# Altium PCB fpga_board.PcbDoc (part 2 of 2)
Units mil, origin at the board's own origin, x right, y up, seen from the top; angles counter-clockwise.
Board outline 3600 x 2770 mil, 6 copper layers (Top Layer, Layer 1, Layer 2, Layer 3, Layer 4, Bottom Layer), stack 32.112 mil thick; 161 components, 170 nets, 630 pads, 157 vias.
Unrouted connection lines stored in the file: 209.
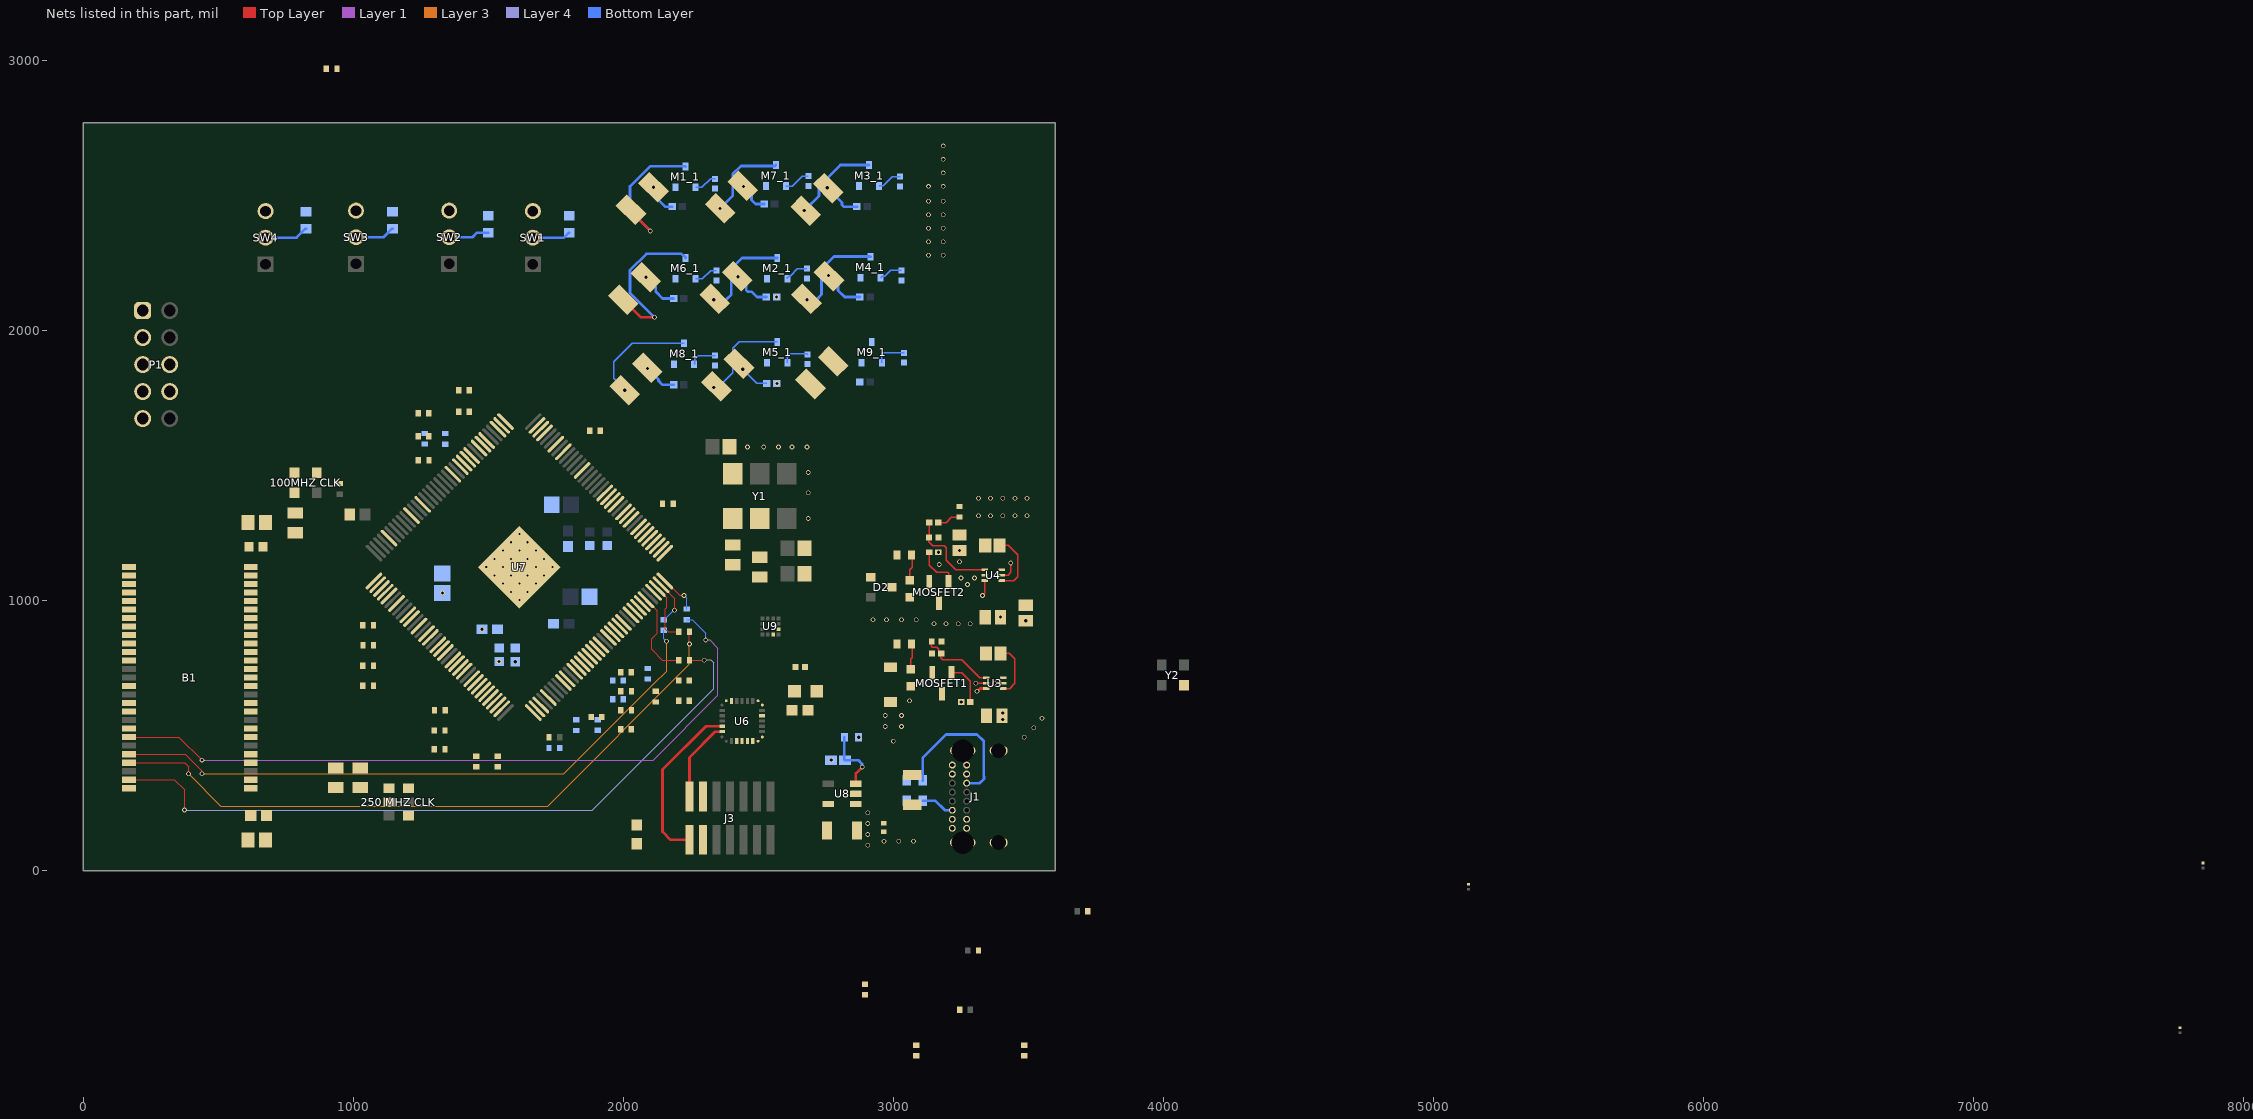
[diagram p6: the nets of this part, all layers, seen from the top]

## Part data (continued)
D2: library part CMP-1060-01004-1, "Zener Voltage Regulator, 225 mW, 3-Pin SOT-23, Pb-Free, Tape and Reel", Manufacturer="On Semiconductor", ComponentLink1Description="Manufacturer URL", ComponentLink1URL=http://www.onsemi.com/, ComponentLink2Description=Datasheet, ComponentLink2URL=http://www.onsemi.cn/pub_link/Collateral/MMBZ5221BLT1-D.PDF, ComponentLink3Description="Package Specification", ComponentLink3URL=http://www.onsemi.cn/pub_link/Collateral/318-08.PDF, DatasheetVersion="Rev. 12", Mounting Technology="Surface Mount", PackageDescription="3-Pin Small Outline Transistor, Body 2.92 x 1.3 mm, Pitch 0.95 mm", PackageReference=SOT-23-3-318-08, PackageVersion="Rev. AP, 11/2009", Packing="Tape and Reel", PartNumber=MMBZ5223BLT1G, RoHS=Pb-Free, VZ Typ (V)=2.7
D3 D4: library part CMP-1426-00006-7, "WURTH ELEKTRONIK - 150060VS75000 - LED, Green, SMD, 0603, 30 mA, 2 V, 570 nm", Case Code (Imperial)=0603, Case Code (Metric)=1608, Color=Green, Forward Current=100mA, Forward Voltage=2V, Max Junction Temperature (Tj)=95°C, Max Operating Temperature=85°C, Max Reverse Voltage (DC)=5V, Min Operating Temperature=-40°C, Power Dissipation=72mW, Test Current=20mA, Case/Package=0603, Dominant Wavelength=570nm, Height=700µm, Length=1.6mm, Lens Style="Clear, Rectangular", Luminous Intensity=40mcd, Mount="Surface Mount", Number of Pins=2, Packaging="Tape and Reel", Peak Wavelength=572nm, REACH SVHC=Unknown, Reverse Voltage=5V, RoHS=Compliant, Viewing Angle=140°, Wavelength=570nm, Width=800µm
D10: library part CMP-1674-00002-6, "LED GREEN CLEAR SMD", Case Code (Imperial)=0805, Case Code (Metric)=2012, Color=Green, Forward Current=30mA, Forward Voltage=2.1V, Lens Color=Colorless, Max Operating Temperature=85°C, Min Operating Temperature=-55°C, Package Quantity=1, Power Dissipation=100mW, Reverse Voltage=5V, Test Current=10mA, Case/Package=0805, Depth=1.25mm, Dominant Wavelength=569nm, Height=1.1mm, Illumination Color=Green, Lead Free="Lead Free", Length=2mm, Lens Style=Diffused, Lens Transparency=Clear, Luminous Intensity=6mcd, Mount="Surface Mount", Number of Elements=1, Number of LEDs=1, Number of Pins=2, Packaging="Tape and Reel", Power Rating=100mW, Radiation Hardening=No, Viewing Angle=130°, Voltage=5V, Wavelength=565nm, Width=1.25mm
J1: library part CMP-196119-000001-2, "CONN RCPT USB2.0 TYPE C 24POS RA", Contact Material="Copper Alloy", Contact Plating=Gold, Gender=Receptacle, Number of Positions=16, Orientation="Right Angle", USB Standard="USB 2.0"
J3: "Connector Header Surface Mount 14 position 0.050\" (1.27mm)", LCSC Part #=C5276598, Manufacturer_Name=SAMTEC, Mouser Part Number=200-FTSH10701FDVKPTR, Arrow Part Number=FTSH-107-01-F-DV-K-P-TR, Arrow Price/Stock=https://www.arrow.com/en/products/ftsh-107-01-f-dv-k-p-tr/samtec?utm_currency=USD&region=nac, Datasheet Link=http://suddendocs.samtec.com/prints/ftsh-1xx-xx-xxx-dv-xxx-xxx-mkt.pdf, Manu Part #=FTSH-107-01-F-DV-K-P-TR, Manufacturer_Part_Number=FTSH-107-01-F-DV-K-P-TR, Mouser Price/Stock=https://www.mouser.co.uk/ProductDetail/Samtec/FTSH-107-01-F-DV-K-P-TR?qs=%252BZP6%2F%252BtExtAI0atx6lcXTg%3D%3D
L1 L2: library part CMP-08253-000154-1, "Shielded Multilayer Inductor 2.2uH ±20% 1000mA 195mΩ SMD 0805", Case Code (Imperial)=0805, Case Code (Metric)=2012, Current Rating=1A, DC Resistance (DCR)=195mR, Inductance=2.2uH, Max Operating Temperature=125°C, Min Operating Temperature=-40°C, Package Quantity=4000, Test Frequency=2MHz, Tolerance=20%, Case/Package=0805, Core Material=Ferrite, Height - Seated (Max)=0.039inch, Lead Free="Lead Free", Length=0.079inch, Mount="Surface Mount", Packaging="Tape and Reel", RoHS Compliant=Yes, Shielding=Shielded, Width=0.049inch
L3: library part CMP-06042-008586-1, "Multilayer type RF Inductor 8.2nH ±5% 0.25Ω 500mA 0402", Case Code (Imperial)=0402, Case Code (Metric)=1005, Current Rating=300mA, DC Resistance (DCR)=330mR, Inductance=8.2nH, Inductance Tolerance=5%, Max Operating Temperature=125°C, Min Operating Temperature=-55°C, Package Quantity=1, Self Resonant Frequency=3.6GHz, Test Frequency=100MHz, Case/Package=0402, Core Material=Air, DC Current=300mA, Depth=0.55mm, Height=0.02inch, Height - Seated (Max)=0.022inch, Lead Free="Lead Free", Length=1mm, Max DC Current=300mA, Military Standard=Not, Mount="Surface Mount", Packaging="Tape and Reel", Q Factor=8, Radiation Hardening=No, REACH SVHC="No SVHC", Shielding=Unshielded, Termination=SMD/SMT, Tolerance=5%, Width=0.5mm
M1_1 M2_1 M3_1 M4_1 M5_1 M6_1 M7_1 M8_1 M9_1: library part CMP-02550-000018-1, "MOSFET N-CH 8V 6A SOT-23", Continuous Drain Current=6A, Drain To Source Breakdown Voltage=8V, Drain To Source Resistance=0.014Ω, Gate To Source Voltage=5V, Input Capacitace At Vds="1070pF @ 4V", Manufacturer=Vishay, Max Forward Diode Voltage=1.2V, Max Junction Temp=+150°C, Package=S-03946, Power Dissipation=1.3W, Pulse Drain Current=30A, Temperature="-55°C to +150°C", Temperature Range Low=-55°C, Typ Forward Diode Voltage=0.82V, Automotive=No, Category=Trans, ComponentLink2Description=Datasheet, ComponentLink2URL=https://www.vishay.com/docs/63302/si2342ds.pdf, Depletion Mode=False, Device Class L1="Discrete Semiconductors", Device Class L2=Transistors, Device Class L3=MOSFETs, Digikey Description="MOSFET N-CH 8V 6A SOT-23", Drain To Source Voltage=8V, Gate Charge At Vgs="10.5nC @ 4.5V", Height=1.12mm, Ipc Land Pattern Name=SOT95P237X100-3, Lead Free=Yes, Manufacturer Part Number=SI2342DS-T1-GE3, Mouser Description="MOSFET 8V 6A 2.5", Number of Channels=1, Number Of N Channels=1, Octopart=https://octopart.com/si2342ds-t1-ge3-vishay-45050957, Reverse Recovery Charge=17nC, Reverse Recovery Time=40ns, RoHS=TRUE, Rthja Max=75°C/W, Standoff Height=0.01mm, Temperature Range High=+150°C, Threshold Vgs Max=0.8V, Threshold Vgs Min=0.35V, Transconductance=75S, Turn Off Delay Time=65ns, Turn On Delay Time=6ns
MOSFET1 MOSFET2 U3 U4: "No Description Available", Manufacturer_Name="Diodes Inc", Copyright="Copyright (C) 2025 Ultra Librarian. All rights reserved.", RefDes=RefDes, Type=Type
  MOSFET1 MOSFET2: Manufacturer_Part_Number=DMP3068L-7
  U3 U4: Manufacturer_Part_Number=AP61300Z6-7
P1: library part CMP-1502-00007-2, Color=Black, Contact Resistance=20mΩ, Current Rating=3A, Flammability Rating="UL94 V-0", Insulation Resistance=1GΩ, Max Operating Temperature=105°C, Min Operating Temperature=-40°C, Operating Supply Voltage=250V, Connector Type="Male Pin", Contact Gender=Male, Contact Material=Copper, Contact Plating=Gold, Gender=Male, Height=8.85mm, Housing Material=PBT, Insulation Material=PBT, Lead Free="Lead Free", Lead Pitch=2.54mm, Length=20.36mm, Mount="Through Hole", NexarPartId=8917783, Number of Contacts=10, Number of Pins=10, Number of Positions=10, Number of Rows=2, Orientation=Vertical, Pitch=2.54mm, REACH SVHC=Unknown, RoHS=Compliant, Row Spacing=2.54mm, Termination=Solder, Voltage Rating=250V, Voltage Rating (DC)=250V, Width=20.36mm
R1 R6: library part CMP-1011-00768-4, "Chip Resistor, 200 KOhm, +/- 1%, 100 mW, -55 to 155 degC, 0402 (1005 Metric), RoHS, Tape and Reel", Case Code (Imperial)=0402, Case Code (Metric)=1005, Manufacturer="Basic Passives", Max Operating Temperature="155 degC", Min Operating Temperature="-55 degC", Package Quantity=10000, Power Rating="100 mW", Resistance="200 KOhm", Tolerance=1%, Voltage Rating="50 V", Case\/Package=0402, ComponentLink1Description="Manufacturer URL", ComponentLink1URL=http://www.panasonic.com/, ComponentLink2Description=Datasheet, ComponentLink2URL=http://industrial.panasonic.com/cdbs/www-data/pdf/RDA0000/AOA0000C86.pdf, DatasheetVersion=04/2015, Height="0.35 mm", Length="1 mm", Mount="Surface Mount", Mounting Technology="Surface Mount", PackageDescription="2-Pin Surface Mount Device, Body 1 x 0.5 mm", PackageReference=0402, Packaging="Tape and Reel", PartNumber=ERJ-2RKF2003X, Pins=2, Radiation Hardening=No, REACH SVHC="No SVHC", RoHSCompliant=true, Width="0.5 mm"
R1_1 R2_1 R3_1 R4_1 R5_1 R6_1 R7_1 R8_1 R9_1: library part CMP-2002-05589-2, "Thick Film Chip Resistors 0402 270Ω 0.0625W 5% 200ppm/°C", Case Code (Imperial)=0402, Case Code (Metric)=1005, Max Operating Temperature=125°C, Min Operating Temperature=-55°C, Package Quantity=10000, Power Rating=62.5mW, Resistance=270R, Temperature Coefficient=200ppm/°C, Tolerance=5%, Voltage Rating=50V, Case/Package=0402, Composition="Thick Film", Contact Plating=Tin, Depth=0.5mm, Height=0.35mm, Length=1mm, Military Standard=Not, Mount="Surface Mount", Packaging="Tape and Reel", Radiation Hardening=No, Termination=SMD/SMT, Thickness=356um, Width=0.5mm
R1_2 R2_2 R3_2 R4_2 R5_2 R6_2 R7_2 R8_2 R9_2: library part CMP-250906-202248-1, "RES Thin Film,  100kΩ, 0.5%, 0.063W, 25ppm/°C, 0402"
R2 R4 R5: library part CMP-2002-07343-1, Manufacturer="Yageo / Phycomp", Part Number=RC0402FR-07100KL
R7: library part CMP-2002-07122-1, Manufacturer="Yageo / Phycomp", Part Number=RC0402FR-0744K2L
R8: library part CMP-2002-07501-2, Case Code (Imperial)=0402, Case Code (Metric)=1005, Max Operating Temperature=155°C, Max Power Dissipation=63mW, Min Operating Temperature=-55°C, Power Rating=62.5mW, Resistance=20kΩ, Temperature Coefficient=100ppm/°C, Tolerance=1%, Voltage Rating=50V, Case/Package=0402, Composition="Thick Film", Depth=500µm, Features="Moisture Resistant", Height=350µm, Lead Free="Lead Free", Length=1mm, Military Standard=Not, NexarPartId=39794396, Number of Pins=2, Number of Terminations=2, Packaging="Tape & Reel", REACH SVHC="No SVHC", RoHS=Compliant, Schedule B="8533210045, 8533210045", Termination=SMD/SMT, Voltage Rating (DC)=50V, Width=500µm
R9 R10 R57: library part CMP-2100-03664-2, "RES 10K OHM 1% 1/10W 0603", Case Code (Imperial)=0603, Case Code (Metric)=1608, Max Operating Temperature=155°C, Max Power Dissipation=100mW, Min Operating Temperature=-55°C, Resistance=10kR, Resistance Tolerance=1%, Resistor Type="Thick Film", Temperature Coefficient=100ppm/°C, Voltage Rating=75V, Voltage Rating (DC)=50V, Case/Package=0603, Construction=Rectangular, Depth=0.8mm, Features="Moisture Resistant", Height=0.45mm, Lead Free="Lead Free", Lead Pitch=0.3mm, Length=1.6mm, Military Standard=Not, Number of Pins=2, Number of Terminations=2, Packaging="Tape and Reel", Power Rating=100mW, RoHS Compliant=Yes, Series=RC, Size Code=0603, Termination=SMD/SMT, Tolerance=1%, Weight=7.1E-05oz, Width=0.8mm
R20 R21 R23 R24 R25 R26 R27 R28 R29 R30 R31 R32 R33 R34 R35 R36 R37 R38 R39 R40 R41 R42 R44 R45 R46 R47 R48 R49 R50 R51 R52 R60 R63 R64 R65 R66 R67 R68 R69 R?: library part CMP-00621-71392720-1, "RT0402BRE0750RL Fixed Resistor, Thin Film, 0.0625W, 50ohm, 50V, 0.1% +/-Tol, 50ppm/Cel, Surface Mount, 0402", Case/Package=0402, Max Operating Temperature=155°C, Max Power Dissipation=63mW, Min Operating Temperature=-55°C, Resistance=50Ω, Temperature Coefficient=50ppm/°C, Tolerance=0.1%, Composition="Thin Film", Features="Moisture Resistant", Height=355.6µm, Length=990.6µm, NexarPartId=71392720, Number of Terminations=2, Packaging="Tape & Reel", RoHS=Compliant, Width=508µm
R53 R54 R55 R56: library part CMP-1012-00086-1, "3K3 0.1W 5% 0603 (1608 Metric)  SMD", Case-EIA=0603, Case-Metric=1608, Power="0.1 W", Tolerance="5 %", Technology=SMT
R58 R59: library part CMP-2000-04091-1, Manufacturer=Yageo, Part Number=RC0603FR-075K1L
R61: library part CMP-03412-049221-1, "RES 47kΩ 5.00% 0.1W 0603", Case Code (Imperial)=0603, Case Code (Metric)=1608, Max Operating Temperature=155°C, Max Power Dissipation=100mW, Min Operating Temperature=-55°C, Ratings=AEC-Q200, Resistance=47kR, Resistor Type="Thick Film", Temperature Coefficient=100ppm/°C, Tolerance=5%, Voltage Rating=50V, Case/Package=0603, Features="Moisture Resistant", Height=0.45mm, Length=1.6mm, Number of Terminations=2, Packaging="Tape and Reel", Power Rating=100mW, RoHS Compliant=Yes, Series=AC, Termination=SMD/SMT, Width=0.8mm
R62: library part CMP-250906-167145-1, "RES Thin Film,  10kΩ, 0.1%, 0.063W, 50ppm/°C, 0402"
R_? R_? R_? R_STDBY1 R_STDBY_2: library part CMP-2002-02973-2, "RES SMD 10K OHM 0.1% 1/16W 0402", Manufacturer=Yageo, Package=RT0402, Power Rating=0.063W, Resistance=10KΩ, Temperature="-55°C to +155°C", Temperature Coefficient="50 ppm/°C", Temperature Range High=+155°C, Temperature Range Low=-55°C, Tolerance=0.001, Voltage Rating=50V, Automotive=No, Category=Res, ComponentLink2Description=Datasheet, ComponentLink2URL=http://www.yageo.com/documents/recent/PYu-RT_1-to-0.01_RoHS_L_9.pdf, Composition="Thin Film", Device Class L1="Passive Components", Device Class L2=Resistors, Device Class L3="Chip SMD Resistors", Digikey Description="RES SMD 10K OHM 0.1% 1/16W 0402", Footprint Url=http://www.yageo.com/exep/pages/download/literatures/PYu-R_Mount_10.pdf, Height=0.35mm, Ipc Land Pattern Name=RESC10050X30, Lead Free=Yes, Manufacturer Part Number=RT0402BRE0710KL, Mouser Description="Res Thin Film 0402 10K Ohm 0.1% 1/16W ±50ppm/°C Molded SMD Paper T/R", Octopart=https://octopart.com/rt0402bre0710kl-yageo-1416557, RoHS=TRUE, Series=RT
R_CLK1 R_CLK2 R_CLK3 R_CLK_4 R_CLK_5: library part CMP-2001-03694-1, Manufacturer="Vishay Dale", Part Number=CRCW080522R0JNTA
SW1 SW2 SW3 SW4: library part CMP-1696-00002-1, "Slide Switch, 500 V, -20 to 70 degC, 3-Pin THD, RoHS", Case\Package=SOT-23-5, Dropout Voltage="300 mV", Max Input Voltage="8 V", Max Operating Temperature="85 degC", Max Ouput Current="150 mA", Max Power Dissipation="250 mW", Min Input Voltage="4.3 V", Min Operating Temperature="-40 degC", Nominal Output Voltage="3.3 V", Package Quantity=3000, ComponentLink1Description="Manufacturer URL", ComponentLink1URL=http://www.e-switch.ch/en/, ComponentLink2Description=Datasheet, ComponentLink2URL=https://www.e-switch.com/system/asset/product_line/data_sheet/119/EG.pdf, DatasheetVersion=Oct-15, Height="1.3 mm", Length="3 mm", Mount="Surface Mount", Output Current="150 mA", Output Voltage="3.3 V", Outputs=1, PackageDescription="3-Pin Through Hole Device, Body 11.6 x 4 mm, Pitch 2.5 mm", PackageReference=EG1218, Packaging="Tape and Reel", Pins=5, Power Rating="250 mW", Radiation Hardening=No, REACH SVHC="No SVHC", RoHSCompliant=true, Width="1.8 mm"
U6: library part CMP-12105-000108-1, "IC MCU 32BIT 64KB FLASH 28UFQFPN"
U7: library part CMP-0038-00212-1, "Cyclone IV Family FPGA, 1.2V Core, 91 I/O Pins, 2 PLLs, 144-Pin QFP, Speed Grade 8, Commercial Grade, Pb-Free", Manufacturer=Altera, Code_JEDEC=MS-026-BFB-HD, ComponentLink1Description="Manufacturer URL", ComponentLink1URL=http://www.altera.com/, ComponentLink2Description=Handbook, ComponentLink2URL=http://www.altera.com/literature/hb/cyclone-iv/cyclone4-handbook.pdf, ComponentLink3Description=Pinout, ComponentLink3URL=http://www.altera.com/literature/lit-dp.jsp?category=cyc%204&showspreadsheet=y, ComponentLink4Description="Package Specification", ComponentLink4URL=http://www.altera.com/devicepackaging/04R00402-00.pdf, DatasheetVersion="ver1.6, Nov-2011", PackageDescription="144-Pin Plastic Enhanced Quad Flat Pack (EQFP) - Wire Bond - A:1.65 - D2:5.4", PackageReference=EQFP144_A-165_D2-54, PackageVersion="ver1.0, Jan-2011"
U8: library part CMP-04917-000053-1, "IC REG LINEAR 3.3V 300MA SOT23-5", Dropout Voltage=125mV, Manufacturer="Texas Instruments", Max Junction Temp=+125°C, Max Supply Voltage=5.5V, Min Supply Voltage=1.4V, Nominal Supply Current=34uA, Output Current=300mA, Output Voltage=3.3V, Package=DBV0005A, Temperature="-40°C to +125°C", Temperature Range Low=-40°C, Accuracy Percentage=1%, Automotive=No, Category=IC, ComponentLink2Description=Datasheet, ComponentLink2URL=http://www.ti.com/lit/ds/symlink/tlv733p.pdf, Device Class L1="Integrated Circuits (ICs)", Device Class L2="Power Management ICs", Device Class L3="Voltage Regulators - Linear", Digikey Description="IC REG LINEAR 3.3V 300MA SOT23-5", Height=1.45mm, Lead Free=Yes, Manufacturer Part Number=TLV73333PDBVR, Mouser Description="LDO Voltage Regulators Capacitr-Free 300-mA 5-SOT-23 -40 to 125", Number Of Outputs=1, Octopart=https://octopart.com/tlv73333pdbvr-texas+instruments-51080890, Output Type=Fixed, RoHS=TRUE, Standoff Height=0mm, Temperature Range High=+125°C
U9: library part CMP-12175-000006-1, "ACCEL 2-16G I2C/SPI 12LGA", Manufacturer=STMicroelectronics, Max Supply Voltage=3.6V, Min Supply Voltage=1.62V, Operating Supply Current=0.38-90uA, Package=LGA12-DM00170568, Temperature="-40°C to +85°C", Temperature Range High=+85°C, Temperature Range Low=-40°C, Accel Range=2/4/8/16g, Accel Resolution=14bits, Automotive=No, Category=IC, ComponentLink2Description=Datasheet, ComponentLink2URL=https://www.st.com/resource/en/datasheet/lis2dw12.pdf, Device Class L1=Sensors, Device Class L2="Motion Sensors", Device Class L3=Accelerometers, Digikey Description="ACCEL 2-16G I2C/SPI 12LGA", Footprint Url=https://www.st.com/content/ccc/resource/technical/document/technical_note/73/17/9c/16/dd/96/4a/01/CD00134799.pdf/files/CD00134799.pdf/jcr:content/translations/en.CD00134799.pdf, Height=0.7mm, Lead Free=Yes, Manufacturer Part Number=LIS2DW12TR, Mouser Description="Accelerometer Triple ±2g/±4g/±8g/±16g 1.62V to 3.6V 0.244mg/digit/0.488mg/digit/0.976mg/digit/1.952mg/digit 12-Pin LG...", Octopart=https://octopart.com/lis2dw12tr-stmicroelectronics-77080925, RoHS=TRUE, Sensor Output=I2C,SPI
Y1: library part CMP-00572-106942874-3, "Renesas XL Family of Low Phase Noise Quartz-based PLL Oscillators", Case/Package=CLCC, Max Input Voltage=3.465V, Max Operating Temperature=85°C, Max Output Frequency=999.9MHz, Min Input Voltage=3.135V, Min Operating Temperature=-40°C, ComponentLink1Description="Manufacturer's Website", ComponentLink1URL=http://www.renesas.com, ComponentLink2Description="Datasheet URL", ComponentLink2URL=https://octopart.com/cad-content/api/get-model-datasheet/15189/106942874, ComponentLink3Description="Manufacturer's Package Drawing", ComponentLink3URL=https://www.renesas.com/en/document/psc/ju6-package-outline-70-x-50-mm-body-13-mm-thick, Height=1.45mm, HelpURL=https://octopart.com/cad-content/api/get-model-datasheet/15189/106942874, Mount="Surface Mount", Number of Pins=6, Output Type=LVDS, RoHS=Compliant
Y2: library part CMP-27762-007622-1, "MEMS OSC XO 50.0000MHZ CMOS SMD", Case/Package=SMD/SMT, Frequency=50MHz, Frequency Stability=50ppm, Load Capacitance=15pF, Max Operating Temperature=85°C, Max Supply Current=16mA, Max Supply Voltage=4V, Min Operating Temperature=-40°C, Min Supply Voltage=-300mV, Operating Supply Voltage=3.3V, Height=0.035inch, Lead Free="Lead Free", Length=0.126inch, Mount="Surface Mount", Number of Pins=4, Packaging="Tape and Reel", REACH SVHC="No SVHC", Series="Pure Silicon™ ASEMB", Termination=SMD/SMT, Width=0.098inch

## Via types
v1: diameter 17.72, hole 11.81, Top Layer to Bottom Layer, 132 vias
v2: diameter 19.68, hole 7.87, Top Layer to Bottom Layer, 25 vias

## Nets (pads, with @x,y where several pads share a name; then routed paths per layer and width w, separated by ;. In a path a pad name is that pad's centre, name@x,y a point inside that pad or via, vN(x,y) a via of type N, cw(c..) or ccw(c..) an arc to the next point about the centre after c; other vN are vias at no path point)
1.2V: C19.2 C20.2 C21.1 C22.2 U7.5 U7.29 U7.37 U7.45 U7.61 U7.78 U7.102 U7.109 U7.116 U7.134
  other v1: 1600,774.41 1540,775 1476.44,895 1330,1029.57
1.2V_OUT: C8.1 L1.2 MOSFET1.3 R1.1 U3.6
1.2V_POWER_OUT: D1.1 D3.2 MOSFET1.2
  other v1: 3000,480 2970,535 3030,535 2970,575 3030,575 3060,630
2.5V: U7.35 U7.107
2.5V_OUT: C10.1 L2.2 MOSFET2.3 R6.1 U4.6
2.5V_POWER_OUT: D2.3 D4.2 MOSFET2.2
3.3V: R2_1.1 R5_1.1
  other v1: 2568.84,1805 2567.68,2125
3v3: "100MHZ CLK.4" "250 MHZ CLK.6" C11.2 C12.2 C13.1 C14.2 C16.2 C17.2 C18.1 C_CLK.1 C_CLK_1.2 C_CLK_3.2 C_CLK_4.1 C_CLK_t5.2 C_CLKt.1 R1_1.1 R3_1.1 R4_1.1 R6_1.1 R7_1.1 R8_1.1 R9_1.1 R_STDBY1.1 R_STDBY_2.1 SW1.1 SW2.1 SW3.1 SW4.1 U7.17 U7.26 U7.40 U7.47 U7.56 U7.62 U7.81 U7.93 U7.117 U7.122 U7.130 U7.139 U9.9 Y1.6 Y2.4
  other v1: 1798.56,915 1804.57,1015 1875,1255.59 1940,1255.59 1795,1258.56 1805.87,1355 2275,1375 2320,1375 2275,1425 2320,1425 2275,1470 2320,1470 2275,1530 2275,1595 2275,1645 2320,1645 2223.84,1800 2913.84,1810 2223.84,2120 2913.84,2125 2218.84,2460 2902.68,2460 2560,2470
3v3: C7.1 C9.1 U3.3 U3.5 U4.3 U4.5 | length 187.1
  Top Layer w5: v1(3330,1020) 3338.5,1028.5 U4.3@3338.5,1075.32 ; v1(3375,695) U3.5@3406.5,695 ; U4.5@3401.5,1095 3425,1095 3435,1105 v1(3435,1140)
  Top Layer w10: v1(3310,665) 3311.57,665 3321.57,675 3330,675
  other v1: 3490,926.43 3397.15,940
5V: CJ_2.2 L3.2 R57.2 U8.1
  other v1: 2905,95 2965,110 3020,110 3075,110 2905,135 2905,175 2905,215 2871.64,495
100MHZ_CLK: R_CLK1.1 U7.23
150MGHZ_CLK: R_CLK2.1 U7.24
150NMGHZ_CLK: R_CLK3.1 U7.25
300MHZ_CLK: R_CLK_5.2 U7.89
300NMHZ_CLK: R_CLK_4.2 U7.88
+3V3: 
\: B1.1 B1.14 B1.27 C23.2 C24.2 C26.2 C27.2 C28.2 R61.1 R_?.1@2895,-459.37 R_?.1@3085,-684.68 R_?.2@3485,-645.32 U6.3 U8.5
"Addr Bit 0": B1.23 R37.1
"Addr BIt 0 Term": R37.2 U7.7
"Addr Bit 1": B1.24 R38.1
"Addr Bit 1 Term": R38.2 U7.33
"Addr Bit 2": B1.25 R39.1
"Addr Bit 2 Term": R39.2 U7.32
"Addr Bit 3": B1.26 R40.1
"Addr Bit 3 Term": R40.2 U7.31
"Addr Bit 4": B1.29 R41.1
"Addr Bit 4 Term": R41.2 U7.66
"Addr Bit 5": B1.30 R42.1
"Addr Bit 5 Term": R42.2 U7.65
"Addr Bit 6": B1.31 R44.1
"Addr Bit 6 Term": R44.2 U7.60
"Addr Bit 7": B1.32 R45.1
"Addr Bit 7 Term": R45.2 U7.59
"Addr Bit 8": B1.33 R46.1
"Addr Bit 8 Term": R46.2 U7.58
"Addr Bit 9": B1.34 R47.1
"Addr Bit 9 Term": R47.2 U7.55
"Addr Bit 10": B1.22 R48.1
"Addr Bit 10 Term": R48.2 U7.54
"Addr Bit 11": B1.35 R49.1
"Addr Bit 11 Term": R49.2 U7.80
"Addr Bit 12": B1.36 R50.1
"Addr Bit 12 Term": R50.2 U7.100
"Bank Select 0": B1.20 R63.2
"Bank Select 0 Term": R63.1 U7.111
"Bank Select 1": B1.21 R64.2
"Bank Select 1 Term": R64.1 U7.110
CC1: J1.A5 R58.1 | length 124
  Bottom Layer w10: R58.1@3109.06,260 3155,260 3190.47,224.53 J1.A5@3218.35,224.53
CC2: J1.B5 R59.1 | length 566.4
  Bottom Layer w10: R59.1@3109.06,335 3109.06,419.06 3195,505 3310,505 3335,480 3335,350 3335.86,349.14 3335.86,340.86 3319.92,324.92 J1.B5@3271.5,324.92
"CLK Input": B1.38 R60.1
"CLK Input Term": R60.2 U7.30
CLK_Enable: B1.37 U7.87
"Column Address Strobe": B1.17 R66.2
"Column Address Strobe Term": R66.1 U7.115
"Data Bit 0": B1.2 R20.1
"Data Bit 0 Term": R20.2 U7.13
"Data Bit 1": B1.4 R21.1
"Data Bit 1 Term": R21.2 U7.11
"Data Bit 2": B1.5 R23.1
"Data Bit 2 Term": R23.2 U7.10
"Data Bit 3": B1.7 R24.1
"Data Bit 3 Term": R24.2 U7.28
"Data Bit 4": B1.8 R25.1
"Data Bit 4 Term": R25.2 U7.53
"Data Bit 5": B1.10 R26.1
"Data Bit 5 Term": R26.2 U7.52
"Data Bit 6": B1.11 R27.1
"Data Bit 6 Term": R27.2 U7.51
"Data Bit 7": B1.13 R28.1
"Data Bit 7 Term": R28.2 U7.50
"Data Bit 8": B1.42 R29.1
"Data Bit 8 Term": R29.2 U7.49
"Data Bit 9": B1.44 R30.1
"Data Bit 9 Term": R30.2 U7.46
"Data Bit 10": B1.45 R31.1
"Data Bit 10 Term": R31.2 U7.39
"Data Bit 11": B1.47 R32.1
"Data Bit 11 Term": R32.2 U7.38
"Data Bit 12": B1.48 R33.1 | length 2664.1
  Top Layer w1.5: B1.48@168.98,495.55 354.45,495.55 v1(440,410)
  Layer 1 w1.5: v1(440,410) 2110,410 2350,650 2350,825 2320,855 v1(2305,855)
  Bottom Layer w1.5: R33.1@2235,930.32 2254.69,930.32 2305,880 v1(2305,855)
"Data Bit 12 Term": R33.2 U7.72 | length 147.9
  Top Layer w1.5: U7.72@2153.68,1073.5 2155.09,1073.5 2208.59,1020 v1(2225,1020)
  Bottom Layer w1.5: v1(2225,1020) 2235,1010 R33.2@2235,969.68
"Data Bit 13": B1.50 R34.1 | length 2339.1
  Top Layer w1.5: B1.50@168.98,432.56 377.44,432.56 438.89,371.11 438.89,361.11 v1(440,360)
  Layer 3 w1.5: v1(440,360) 1780,360 2115,695 2160,740 v1(2160,850)
  Bottom Layer w1.5: R34.1@2150,890.63 2150,860 v1(2160,850)
"Data Bit 13 Term": R34.2 U7.71 | length 170
  Top Layer w1.5: U7.71@2139.76,1059.58 2139.76,1057.41 2190,1007.17 v1(2190,965)
  Bottom Layer w1.5: R34.2@2150,930 2151.97,930 2161.06,939.09 2161.06,939.24 2183.72,961.9 2186.9,961.9 v1(2190,965)
"Data Bit 14": B1.51 R35.1 | length 2494.8
  Top Layer w1.5: B1.51@168.98,401.06 170.04,400 375,400 390,385 v1(390,360) ; v1(2245,840) R35.1@2245,885
  Layer 3 w1.5: v1(390,360) 510,240 1720,240 2245,765 v1(2245,840)
"Data Bit 14 Term": R35.2 U7.70 | length 220.6
  Top Layer w1.5: U7.70@2125.84,1045.66 2160,1011.5 2160,975 2155.63,970.63 2155.63,895.25 2165.88,885 R35.2@2205.63,885
"Data Bit 15": B1.53 R36.1 | length 2633.3
  Top Layer w1.5: B1.53@168.98,338.07 336.93,338.07 375,300 v1(375,225) ; R36.1@2245,780 v1(2300,780)
  Layer 4 w1.5: v1(375,225) 1885,225 2335,675 2335,770 2323.85,781.15 2301.15,781.15 v1(2300,780)
"Data Bit 15 Term": R36.2 U7.64 U7.67 | length 326.3
  Top Layer w1.5: U7.67@2084.08,1003.9 2125,962.99 2125,880 2105,860 2105,820 2145,780 R36.2@2205.63,780
DEBUG_SWCLK: U6.21
DEBUG_SWDIO: U6.20
DEBUG_SWO: 
EN: C15.2 R57.1 U8.3 | length 239.2
  Top Layer w10: U8.3@2861.18,322.4 2861.18,361.18 v1(2885,385)
  Bottom Layer w10: R57.1@2818.36,495 2818.36,411.86 C15.2@2820.22,410 2870,410 2883.52,396.48 2883.52,386.48 v1(2885,385)
FB_Voltage_1.25: R1.2 R2.1 U3.1 | length 286.7
  Top Layer w5: R1.2@3142.28,850 3140,847.72 3140,831.26 3142.93,828.33 3160.26,828.33 3168.54,820.05 3168.54,813.2 R2.1@3176.73,805 3175,803.27 3175,790 3183.33,781.67 3253.33,781.67 3320.31,714.68 U3.1@3343.5,714.68
FB_Voltage_2.5: R6.2 R7.1 U4.1 | length 350.4
  Top Layer w5: R6.2@3132.28,1235 3130,1232.72 3130.4,1232.32 3130.4,1219.6 3146.67,1203.33 3188.74,1203.33 3195,1197.07 3195,1150 3230.31,1114.68 U4.1@3338.5,1114.68 ; R6.2@3132.78,1235.49 R7.1@3132.78,1289.51
  Top Layer w10: R7.1@3132.78,1289.51 R7.1@3133.27,1290
Floating: P1.6 P1.7 P1.8
FPGA_CLK: R51.2
FPGA_DI: R?.2
FPGA_DI: R?.1
FPGA_DO: R52.2
GND: "100MHZ CLK.2" "250 MHZ CLK.3" B1.28 B1.54 C7.2 C8.2 C9.2 C10.2 C11.1 C12.1 C13.2 C14.1 C15.1 C16.1 C17.1 C18.2 C19.1 C20.1 C21.2 C22.1 C23.1 C24.1 C26.1 C27.1 C28.1 C_CLK.2 C_CLK_1.1 C_CLK_3.1 C_CLK_4.2 C_CLK_t5.1 C_CLKt.2 CJ_1.1 CJ_2.1 D1.2 D2.1 D10.1 J1.1 J1.2 J1.3 J1.4 J1.A1 J1.A12 J1.B1 J1.B12 J3.11 M1_1.2 M2_1.2 M3_1.2 M4_1.2 M5_1.2 M6_1.2 M7_1.2 M8_1.2 M9_1.2 R1_2.1 R2.2 R2_2.1 R3_2.1 R4.2 R4_2.1 R5.2 R5_2.1 R6_2.1 R7_2.1 R8.2 R8_2.1 R9.1 R9_2.1 R10.1 R53.1 R54.1 R55.1 R56.1 R58.2 R59.2 R62.1 SW1.3 SW2.3 SW3.3 SW4.3 U3.2 U4.2 U6.4 U7.4 U7.19 U7.22 U7.27 U7.41 U7.48 U7.57 U7.63 U7.79 U7.82 U7.95 U7.118 U7.123 U7.131 U7.140 U7.145 U8.2 U9.6 U9.8 Y1.3 Y2.2 | length 38.5
  Top Layer w5: v1(3305,695) U3.2@3343.5,695
  other v1: 2770,410 3485,495 3520,530 3405,560 3550,565 3405,585 3251.54,625 3150,915 3195,915 3240,915 3285,915 2925,930 2975,930 3030,930 3085,930 3275,1060 3250,1085 3300,1085 3170,1135 3245,1145 3166.73,1180 3245,1186.43 2685,1305 3315,1315 3360,1315 3405,1315 3450,1315 3495,1315 3315,1380 3360,1380 3405,1380 3450,1380 3495,1380 2685,1400 2685,1475 2460,1570 2520,1570 2575,1570 2625,1570 2680,1570 3130,2280 3185,2280 3130,2330 3185,2330 3130,2380 3185,2380 3130,2430 3185,2430 3130,2480 3185,2480 3130,2535 3185,2535 3185,2585 3185,2635 3185,2685
  other v2: 1615,1002.51 1584.38,1033.13 1645.62,1033.13 1553.75,1063.75 1615,1063.75 1676.25,1063.75 1523.13,1094.38 1584.38,1094.38 1645.62,1094.38 1706.87,1094.38 1492.51,1125 1553.75,1125 1615,1125 1676.25,1125 1737.49,1125 1523.13,1155.62 1584.38,1155.62 1645.62,1155.62 1706.87,1155.62 1553.75,1186.25 1615,1186.25 1676.25,1186.25 1584.38,1216.87 1645.62,1216.87 1615,1247.49
"Higher Byte Mask": B1.39 R68.2
"Higher Byte Mask Term": R68.1 U7.120
IO1: M1_1.1 R1_2.2 U7.83 | length 85.7
  Bottom Layer w5: M1_1.1@2267.4,2531.24 2291.24,2531.24 2322.86,2562.86 R1_2.2@2340,2562.86
IO2: M2_1.1 R2_2.2 U7.75 | length 90
  Bottom Layer w5: M2_1.1@2607.4,2192.48 2607.4,2195.73 2615.91,2204.23 2619.15,2204.23 2644.92,2230 R2_2.2@2680,2230
IO3: M3_1.1 R3_2.2 U7.74 | length 91.9
  Bottom Layer w5: M3_1.1@2947.4,2536.24 2949.14,2537.98 2962.98,2537.98 2995.71,2570.71 R3_2.2@3025,2570.71
IO4: M4_1.1 R4_2.2 U7.73 | length 90.4
  Bottom Layer w5: M4_1.1@2952.4,2196.24 2959.14,2202.98 2967.98,2202.98 2990,2225 3027.86,2225 R4_2.2@3030,2222.86
IO5: M5_1.1 R5_2.2 U7.3 | length 103
  Bottom Layer w5: M5_1.1@2607.4,1881.24 2607.4,1902.4 2620,1915 2679.83,1915 R5_2.2@2682.8,1912.03
IO6: M6_1.1 R6_2.2 U7.2 | length 90.2
  Bottom Layer w5: M6_1.1@2267.4,2192.48 2292.48,2192.48 2322.86,2222.86 R6_2.2@2345,2222.86
IO7: M7_1.1 R7_2.2 U7.1 | length 97.8
  Bottom Layer w5: M7_1.1@2602.4,2536.24 2626.31,2536.24 2662.93,2572.86 R7_2.2@2685,2572.86
IO8: M8_1.1 R8_2.2 U7.34 | length 100.2
  Bottom Layer w5: M8_1.1@2262.4,1876.24 2265.06,1878.9 2265.06,1895.06 2277.86,1907.86 R8_2.2@2340,1907.86
IO9: M9_1.1 R9_2.2 U7.69 | length 116.1
  Bottom Layer w5: M9_1.1@2957.4,1881.24 2957.4,1912.6 2962.66,1917.86 R9_2.2@3040,1917.86
"JTAG TCK": P1.1 U7.16
"JTAG TDI": P1.9 U7.15
"JTAG TDO": P1.3 U7.20
"JTAG TMS": P1.5 U7.18
"Lower Byte Mask": B1.15 R67.2
"Lower Byte Mask Term": R67.1 U7.119
MEM_CS: R_?.1@3485,-684.68 U7.84
Net3_1_1: 3_1.1 M3_1.3 | length 330.4
  Bottom Layer w10: v1(2670,2445) 2725,2500 2725,2535 2803.76,2613.76 M3_1.3@2910,2613.76
Net3_1_2: 3_1.2 R3_1.2 | length 144.4
  Bottom Layer w10: v1(2755,2530) 2810,2475 2810,2465.86 2815.86,2460 R3_1.2@2865,2460
"Net100MHZ CLK_1": "100MHZ CLK.1" R_STDBY1.2
"Net100MHZ CLK_3": "100MHZ CLK.3" R_CLK1.2
"Net250 MHZ CLK_1": "250 MHZ CLK.1" R_STDBY_2.2
"Net250 MHZ CLK_4": "250 MHZ CLK.4" R_CLK2.2
"Net250 MHZ CLK_5": "250 MHZ CLK.5" R_CLK3.2
NetD1_1_1: D1_1.1 M1_1.3 | length 540.6
  Top Layer w10: D1_1.1@2028.24,2448.24 2028.24,2441.76 v1(2100,2370)
  Bottom Layer w10: v1(2100,2370) 2025,2445 2025,2535 2100,2610 2228.76,2610 M1_1.3@2230,2608.76
NetD1_1_2: D1_1.2 R1_1.2 | length 115.8
  Bottom Layer w10: v1(2111.76,2531.76) 2130,2513.52 2130,2485 2155,2460 R1_1.2@2181.16,2460
NetD2_1_1: D2_1.1 M2_1.3 | length 354.9
  Bottom Layer w10: v1(2335,2115) 2380,2115 2400,2135 2400,2230 2440,2270 M2_1.3@2570,2270
NetD2_1_2: D2_1.2 R2_1.2 | length 147.3
  Bottom Layer w10: v1(2425,2200) 2455,2170 2455,2150.86 2460.86,2145 2475,2145 2495,2125 R2_1.2@2530,2125
NetD3_1: D3.1 R9.2 | length 97
  Top Layer w5: D3.1@3065,746.5 3065,785 3070,790 3070,836.64 R9.2@3066.64,840
NetD4_1: D4.1 R10.2 | length 99
  Top Layer w5: D4.1@3060,1076.5 3060,1115 3070,1125 3070,1166.64 R10.2@3066.64,1170
NetD4_1_1: D4_1.1 M4_1.3 | length 357.4
  Bottom Layer w10: v1(2680,2115) 2715,2115 2734.21,2134.21 2734.21,2229.21 2780,2275 2913.76,2275 M4_1.3@2915,2273.76
NetD4_1_2: D4_1.2 R4_1.2 | length 161
  Bottom Layer w10: v1(2760,2205) 2795,2170 2795,2150 2820,2125 R4_1.2@2876.16,2125
NetD5_1_1: D5_1.1 M5_1.3 | length 357.6
  Bottom Layer w5: v1(2335,1790) 2350,1790 2405,1845 2405,1935 2428.76,1958.76 M5_1.3@2570,1958.76
NetD5_1_2: D5_1.2 R5_1.2 | length 110.4
  Bottom Layer w5: v1(2442.5,1857.5) 2495,1805 R5_1.2@2531.16,1805
NetD6_1_1: D6_1.1 M6_1.3 | length 592.2
  Top Layer w10: D6_1.1@2000,2115 2065,2050 v1(2115,2050)
  Bottom Layer w10: v1(2115,2050) 2025,2140 2025,2225 2085,2285 2215,2285 2220.75,2279.25 2224,2279.25 2230,2273.25 M6_1.3@2230,2270
NetD6_1_2: D6_1.2 R6_1.2 | length 145.1
  Bottom Layer w10: v1(2083.52,2198.52) 2120,2162.03 2120,2145 2145,2120 R6_1.2@2186.16,2120
NetD7_1_1: D7_1.1 M7_1.3 | length 320.1
  Bottom Layer w10: v1(2358.24,2453.24) 2405,2500 2405,2580 2435.51,2610.51 2561.75,2610.51 M7_1.3@2565,2613.76
NetD7_1_2: D7_1.2 R7_1.2 | length 116
  Bottom Layer w10: v1(2445,2535) 2475,2505 2475,2485 2490,2470 R7_1.2@2522.32,2470
NetD8_1_1: D8_1.1 M8_1.3 | length 410
  Bottom Layer w5: v1(2005,1780) 2005,1785 1965,1825 1965,1885 2033.76,1953.76 M8_1.3@2225,1953.76
NetD8_1_2: D8_1.2 R8_1.2 | length 123.9
  Bottom Layer w10: v1(2090,1860) 2130,1820 2130,1815 2145,1800 R8_1.2@2186.16,1800
NetD9_1_1: D9_1.1 M9_1.3
NetD9_1_2: D9_1.2 R9_1.2
NetD10_2: D10.2 R62.2
NetFLASH_MEM_1_3: R_?.2@2895,-420
NetFLASH_MEM_1_7: R_?.2@3085,-645.32
NetL1_1: L1.1 U3.4 | length 203.3
  Top Layer w5: L1.1@3396.61,805 3430,805 3450,785 3450,695 3430.31,675.32 U3.4@3406.5,675.32
NetL2_1: L2.1 U4.4 | length 225.9
  Top Layer w5: L2.1@3393.22,1205 3425,1205 3460,1170 3460,1090 3445.31,1075.32 U4.4@3401.5,1075.32
NetMOSFET1_1: MOSFET1.1 R4.1 | length 159.8
  Top Layer w5: MOSFET1.1@3216.02,734 3254,734 3285,703 R4.1@3285,625
NetMOSFET2_1: MOSFET2.1 R5.1 | length 164.4
  Top Layer w5: R5.1@3133.27,1180 3133.27,1131.73 3160,1105 3202.07,1105 3205,1102.07 MOSFET2.1@3205,1070
NetR7_2: R7.2 R8.1 | length 86.7
  Top Layer w5: R7.2@3166.73,1290 3195,1290 3215.31,1310.32 R8.1@3245,1310.32
NetR_CLK_4_1: R_CLK_4.1 Y1.5
NetR_CLK_5_1: R_CLK_5.1 Y1.4
NRST: J3.12 R61.2 U6.5
"Row Address Strobe": B1.18 R65.2
"Row Address Strobe Term": R65.1 U7.114
"SDRAM Select": B1.19 U7.86
"SPI1 CLK": U6.7
"SPI1 MISO": U6.12
"SPI1 MOSI": U6.8
"SPI1 NSS": U6.14
"SPI2 CLK": U6.6
"Stat LED1": U6.15
SW_IN1: R53.2 SW1.2 U7.77 | length 142.7
  Bottom Layer w10: SW1.2@1665,2345 1779.53,2345 1798.03,2363.5 R53.2@1800,2363.5
SW_IN2: R54.2 SW2.2 U7.76 | length 152
  Bottom Layer w10: SW2.2@1355,2346.57 1441.57,2346.57 1458.5,2363.5 R54.2@1500,2363.5
SW_IN3: R55.2 SW3.2 U7.106 | length 148.2
  Bottom Layer w10: SW3.2@1010,2346.57 1111.1,2346.57 1143.03,2378.5 R55.2@1145,2378.5
SW_IN4: R56.2 SW4.2 U7.105 | length 163.9
  Bottom Layer w10: SW4.2@675,2345 789.53,2345 823.03,2378.5 R56.2@825,2378.5
USART1_RX: J3.13 U6.27 | length 305.8
  Top Layer w10: J3.13@2245,275.12 2245,420 2340.31,515.32 2348.24,515.32 ; 2348.41,515.14 2348.24,515.32 ; U6.27@2366.18,515.32 2348.24,515.32
USART1_TX: J3.14 U6.26 | length 630.1
  Top Layer w10: J3.14@2245,114.88 2244.88,115 2175,115 2145,145 2145,375 2305.31,535.32 U6.26@2366.18,535.32
VBUS: CJ_1.2 J1.A4 J1.A9 J1.B4 J1.B9 L3.1
"Write Enable": B1.16 R69.2
"Write Enable Term": R69.1 U7.121
pads on no net: "250 MHZ CLK.2" B1.3 B1.6 B1.9 B1.12 B1.40 B1.41 B1.43 B1.46 B1.49 B1.52 D2.2 J1.A6 J1.A7 J1.A8 J1.B6 J1.B7 J1.B8 J3.01 J3.02 J3.03 J3.04 J3.05 J3.06 J3.07 J3.08 J3.09 J3.10 P1.2 P1.4 P1.10 R51.1 R52.1 U6.1 U6.2 U6.9 U6.10 U6.11 U6.13 U6.16 U6.17 U6.18 U6.19 U6.22 U6.23 U6.24 U6.25 U6.28 U7.6 U7.8 U7.9 U7.12 U7.14 U7.21 U7.36 U7.42 U7.43 U7.44 U7.68 U7.85 U7.90 U7.91 U7.92 U7.94 U7.96 U7.97 U7.98 U7.99 U7.101 U7.103 U7.104 U7.108 U7.112 U7.113 U7.124 U7.125 U7.126 U7.127 U7.128 U7.129 U7.132 U7.133 U7.135 U7.136 U7.137 U7.138 U7.141 U7.142 U7.143 U7.144 U8.4 U9.1 U9.2 U9.3 U9.4 U9.5 U9.7 U9.10 U9.11 U9.12 Y1.1 Y1.2 Y2.1 Y2.3

## Polygon pours and split planes (outlines as drawn)
GND on Top Layer "GND" (solid, remove dead copper, pour order 9): 2650,1675 2360,1675 2360,1430 2370,1420 2445,1420 2650,1420 2650,0 3595,0 3595,2770 2650,2770
1.2V_OUT on Top Layer "1.25V_OUT" (solid, remove dead copper, pour order 7): 3165,750 3165,530 3455,530 3520,595 3520,860 3310,860 3285,885 3165,885
3v3 on Top Layer "3v3" (solid, remove dead copper, pour order 10): 2575,1055 2645,1055 2645,1420 2370,1420 2360,1430 2360,1675 2255,1675 2255,1340 2570,1340 2570,1060
5V on Top Layer "5V" (solid, remove dead copper, pour order 0): 2832.88,266.06 2833.94,265 2930,265 2930,155 3100,155 3100,75 2835,75
VBUS on Top Layer "VBUS" (solid, remove dead copper, pour order 1): 3310,215 3315,220 3350,220 3350,345 3180,345 3180,375 3405,375 3405,165 2930,165 2930,265 3114,265 3125,254 3125,215
1.2V_POWER_OUT on Top Layer "1.25V_POWER_OUT" (solid, remove dead copper, pour order 4): 3055,590 3055,455 2950,455 2950,645 2956.08,645 3021.08,710 3125,710 3125,760 3160,760 3160,695
2.5V_OUT on Top Layer "2.5V_OUT" (solid, remove dead copper, pour order 2): 3125,1035 3125,950 3390,950 3515,1075 3515,1270 3150,1270 3150,1220 3260,1220 3290,1190 3290,1135 3360,1135 3360,1035
2.5V_POWER_OUT on Top Layer "2.5V_OUT" (solid, remove dead copper, pour order 3): 2965,1070 3018.98,1071.02 3035,1055 3035,1040 3075,1040 3115,1080 3115,1095 3155,1095 3155,1040 3090,975 2965,975
3v3 on Layer 2 "+3v3" (solid, remove dead copper, pour order 6): 2815,1510 2819.94,1505.06 3600.62,1505.06 3600.62,0.62 3600,0 2815,0
GND on Bottom Layer "GND" (solid, remove dead copper, pour order 13): 2965,1505 3580,1505 3580,20 3105,20 3105,150 3100,155 2965,155
5V on Bottom Layer "5V" (solid, remove dead copper, pour order 11): 2965,525 2965,155 3100,155 3100,75 2845,75 2845,80 2845,525
GND on Bottom Layer "GND" (solid, remove dead copper, pour order 8): 0,2770 3250,2770 3250,1560 5,1560
GND on Layer 1 "GND" (solid, remove dead copper, pour order 5): 3595,-5 3595,2770 0,2770 0,-10 -10,0 -35,0
GND on Layer 3 "GND" (solid, remove dead copper, pour order 12): 0,2770 0,0 5,-5 3600,-5 3600,2765 3595,2770
3v3 on Layer 4 "3v3" (solid, remove dead copper, pour order 14): 1760,1395 1760,1180 1815,1125 1815,1090 1810,1090 1760,1040 1760,855 1920,855 2350,1285 2350,1670 2255,1670 2255,1580 1945,1580

## Keep-outs
Keep-Out Layer:
  lines w40: 0,0 0,2769.55 3599.55,2769.55 3599.55,0.45 3599.1,0 0.45,0

## Silkscreen, mask and mechanical layers (free items; w line width, h text height)
Top Overlay:
  lines w10: 1910,1675 1910,2475 2070,2635 2885,2635 2885,1815 2745,1675 1910,1675
  text "3x3 LED Matrix" at 2290,2690.5 h45
  text "UBC Blaster" at 530.5,1985 h45 r270
  text "1.25V & 2.5V" at 3095,1425.75 h45
  text "SDRAM" at 310,1190.5 h45
  text "CPU" at 2495,350.5 h45
Mechanical 1:
  the board outline again, w10